# Altium PCB PCB_supply unit.PcbDoc
Units mm, origin at the board's own origin, x right, y up, seen from the top; angles counter-clockwise.
Board outline 65.5 x 61 mm, 4 copper layers (Top Layer, INT1, INT2, Bottom Layer), stack 1.49 mm thick; 38 components, 30 nets, 162 pads, 67 vias.
Unrouted connection lines stored in the file: 155.
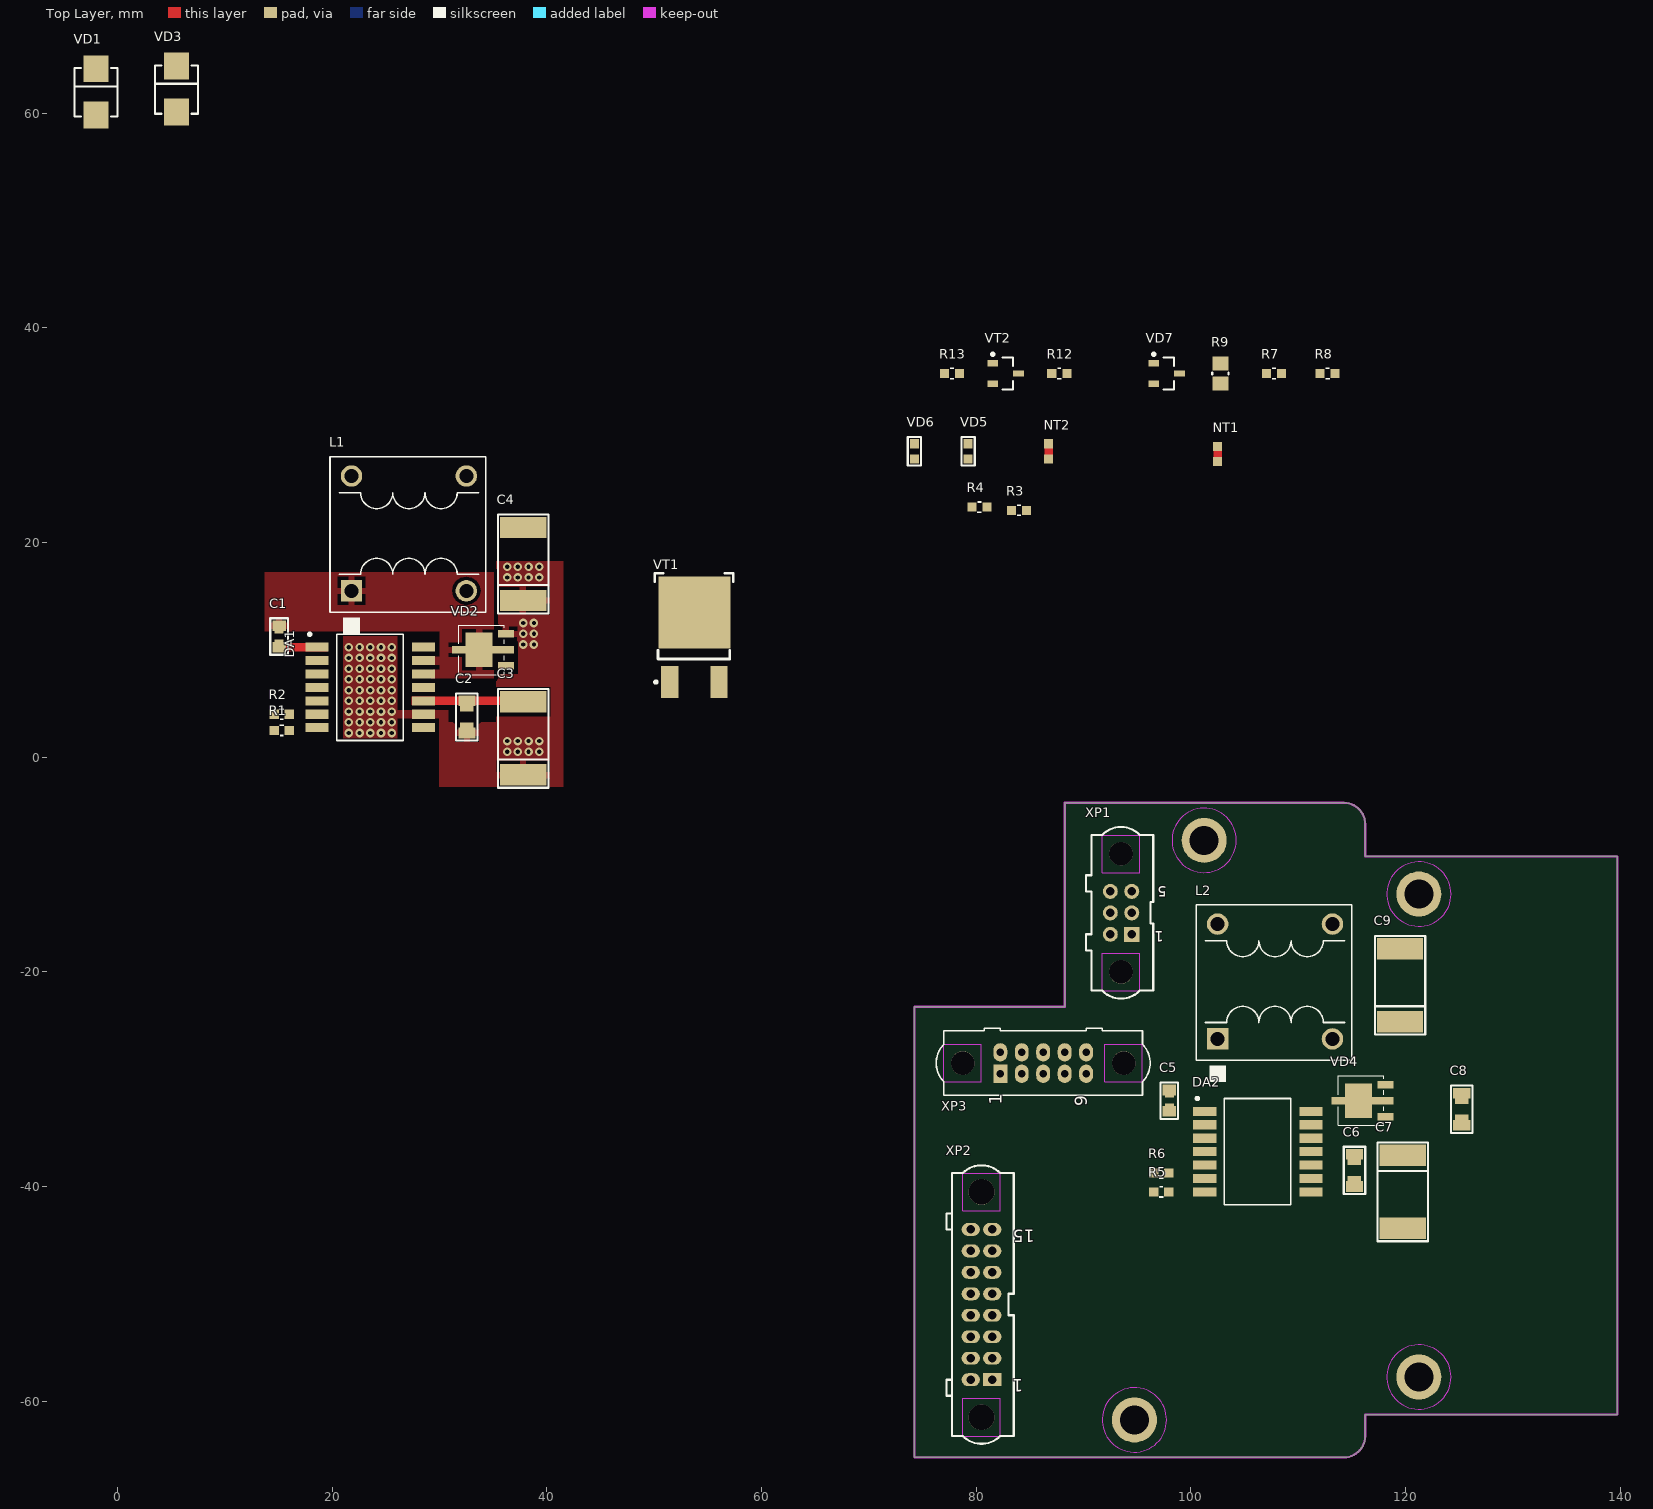
[diagram p0: Top Layer view]
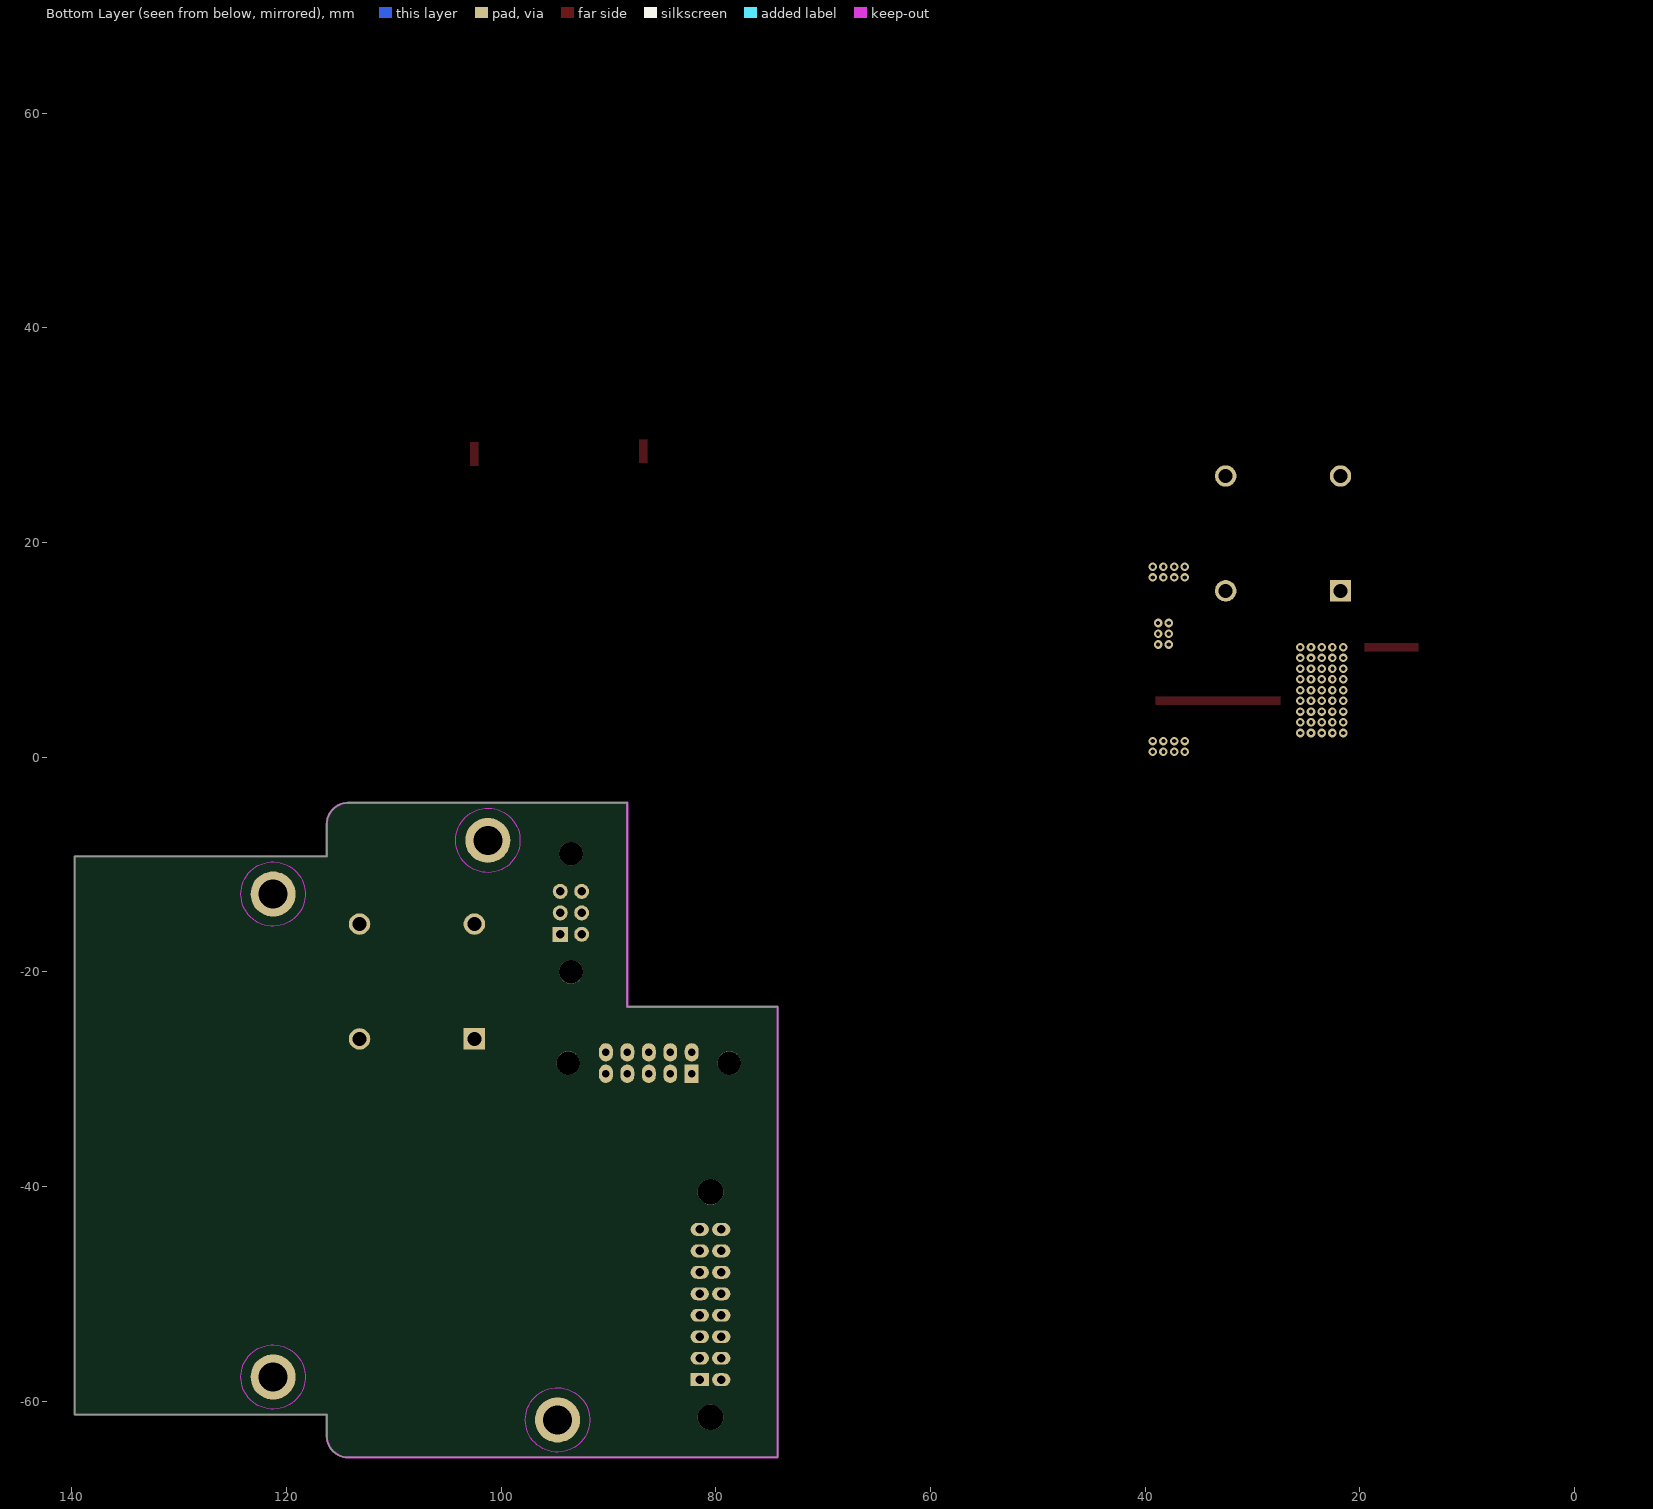
[diagram p1: Bottom Layer view, seen from below]
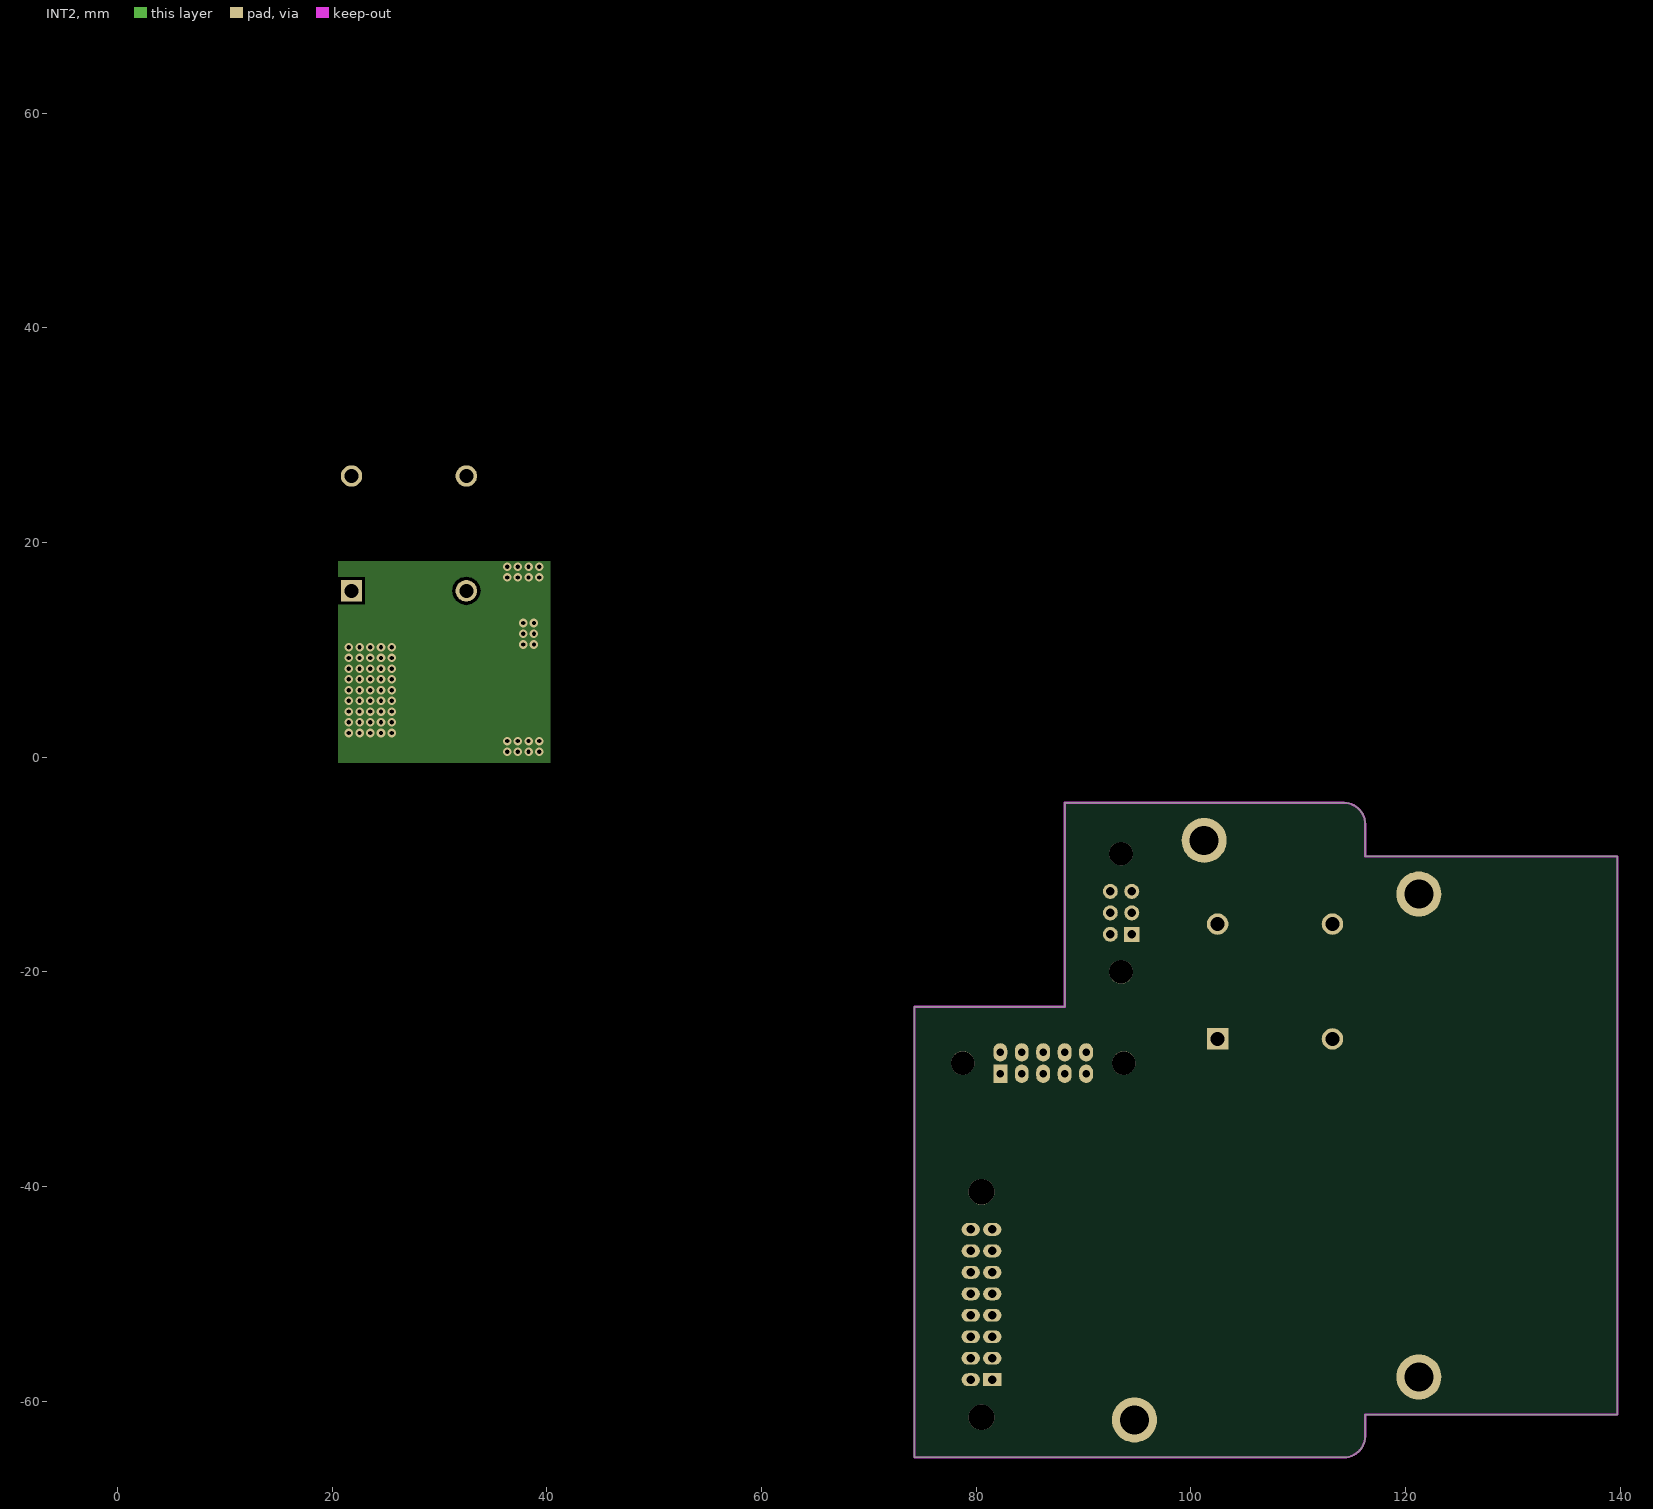
[diagram p2: INT2]

## Layer stack, top to bottom
Top Solder: solder mask 0.0102, Solder Resist, Dk 3.5
Top Layer: signal copper 0.035
PREPREG1: prepreg 0.32, 2116+7628, Dk 4.2
INT1: signal copper 0.035
CORE1: core 0.71, FR-4, Dk 4.2
INT2: signal copper 0.035
PREPREG2: prepreg 0.32, 2116+7628, Dk 4.2
Bottom Layer: signal copper 0.035
Bottom Solder: solder mask 0.0102, Solder Resist, Dk 3.5

## Board outline
74.25,-65.25 74.25,-23.25 88.25,-23.25 88.25,-4.25 114.25,-4.25 cw(c114.25,-6.25) 116.25,-6.25 116.25,-9.25 139.75,-9.25 139.75,-61.25 116.25,-61.25 116.25,-63.25 cw(c114.25,-63.25) 114.25,-65.25

## Design rules (kind name [scope] priority, off if disabled: settings)
Clearance Clearance_MultiLayerPad [OnLayer('Multi-Layer') and IsPad] p1: gap=0.3 ignorepadtopadclearanceinfootprint=FALSE except(0: Arc-Hole Track-Hole SMDPad-Hole THPad-Hole Via-Hole Fill-Hole Poly-Hole Region-Hole Text-Hole)
Clearance Clearance_Polygon [InPolygon] p2: gap=0.4 ignorepadtopadclearanceinfootprint=FALSE except(0: Arc-Hole Track-Hole SMDPad-Hole THPad-Hole Via-Hole Fill-Hole Poly-Hole Region-Hole Text-Hole)
Clearance [All] p3: gap=0.3 ignorepadtopadclearanceinfootprint=FALSE except(0: Arc-Hole Track-Hole SMDPad-Hole THPad-Hole Via-Hole Fill-Hole Poly-Hole Region-Hole Text-Hole)
ComponentClearance [All] p1 off: gap=0.254 collisioncheckmode=3 verticalgap=0.254 showdistances=FALSE
DiffPairsRouting [All] p1: maxlimit=0.254 minlimit=0.15 mostfreqgap=0.254 toplayer_minwidth=0.15 toplayer_maxwidth=0.381 toplayer_prefwidth=0.381 midlayer1_minwidth=0.15 midlayer1_maxwidth=0.381 midlayer1_prefwidth=0.381 midlayer2_minwidth=0.15 midlayer2_maxwidth=0.381 midlayer2_prefwidth=0.381 bottomlayer_minwidth=0.15 bottomlayer_maxwidth=0.381 bottomlayer_prefwidth=0.381 maxuncoupledlength=12.7
Height [All] p1: minheight=0 maxheight=60 prefheight=12.7
HoleSize [All] p1: absolutevalues=TRUE maxlimit=5 minlimit=0.3 maxpercent=80.000 minpercent=20.000
HoleToHoleClearance [All] p1: gap=0.2 allowstackedmicrovias=TRUE
MinimumAnnularRing MinimumAnnularRing_1 [All] p1: minimumring=0.2
MinimumSolderMaskSliver [All] p1: minsoldermaskwidth=0.15
PlaneClearance [All] p1: clearance=0.5
PlaneConnect [All] p1: planeconnectstyle=Relief reliefexpansion=0.5 reliefentries=4 reliefconductorwidth=0.3 reliefairgap=0.2
PolygonConnect PolygonConnect_PowerPAD [All vs InComponentClass('PowerPad')] p1: connectstyle=Direct reliefconductorwidth=1 reliefentries=4 polygonreliefangle="90 Angle" airgapwidth=0.3 // direct connection
PolygonConnect PolygonConnect_PadGND [InNet('GND') and IsPad] p2: connectstyle=Relief reliefconductorwidth=0.4 reliefentries=4 polygonreliefangle="90 Angle" airgapwidth=0.2
PolygonConnect PolygonConnect_Pad_thrue [InNet('GND2') and IsPad] p3: connectstyle=Relief reliefconductorwidth=0.4 reliefentries=4 polygonreliefangle="90 Angle" airgapwidth=0.2
PolygonConnect PolygonConnect_Via [IsVia] p4: connectstyle=Direct reliefconductorwidth=0.254 reliefentries=4 polygonreliefangle="90 Angle" airgapwidth=0.254
PolygonConnect [All] p5: connectstyle=Relief reliefconductorwidth=0.6 reliefentries=4 polygonreliefangle="90 Angle" airgapwidth=0.3
RoomDefinition supply_unit [InComponentClass('supply_unit')] p1 off: confinementstyle=ConfineIn formatcopy=TRUE lockcomponents=FALSE outline 69,10.75 117.75,10.75 117.75,45.75 69,45.75
RoutingVias [All] p1: holewidth=0.3 width=0.7 viastyle="Through Hole" minholewidth=0.3 minwidth=0.7 maxholewidth=0.5 maxwidth=1.2
SilkToSilkClearance [All] p1: silktosilkclearance=0
SilkToSolderMaskClearance [IsPad] p1: minsilkscreentomaskgap=0.05 clearancetoexposedcopper=TRUE
SolderMaskExpansion [All] p1: expansion=0.1
Width [All] p1: maxlimit=10 minlimit=0.3 preferedwidth=0.6
20 further rules are at their usual default settings.

## Classes and differential pairs
component class PowerPad: DA1 DA2

## Components (designator, comment, footprint, x,y, rotation, side; value= is the part's Value field where it differs from the comment)
C1 "Ceramic capacitor, 0.01мк, Н20, ±10%, 50V, 0603," "CAP: 0603+0805" 15.05,11.25 r270 top value=0.01мк
C2 "Ceramic capacitor, 0.1мк, Н20, ±10%, 50V, 0805," "CAP: 0805+1206" 32.55,3.75 r90 top value=0.1мк
C3 "Tantalum capacitor, 10мк, 25V, ±10%, 0.7 Ом, case E, -60...+125°C" "CAP: TANTAL-E" 37.8,1.75 r90 top value=10мк
C4 "Tantalum capacitor, 68мк, 25V, ±10%, 0.7 Ом, case E, -60...+125°C" "CAP: TANTAL-E" 37.8,18 r90 top value=68мк
C5 "Ceramic capacitor, 0.01мк, Н20, ±10%, 50V, 0603," "CAP: 0603+0805" 98,-32 r270 top value=0.01мк
C6 "Ceramic capacitor, 0.1мк, Н20, ±10%, 50V, 0805," "CAP: 0805+1206" 115.25,-38.5 r270 top value=0.1мк
C7 "Tantalum capacitor, 10мк, 25V, ±10%, 0.7 Ом, case E, -60...+125°C" "CAP: TANTAL-E" 119.75,-40.5 r270 top value=10мк
C8 "Ceramic capacitor, 0.1мк, Н20, ±10%, 50V, 0805," "CAP: 0805+1206" 125.25,-32.8 r270 top value=0.1мк
C9 "Tantalum capacitor, 100мк, 20V, ±10%, 0.5-0.7 Ом, case E, -60...+125°C" "CAP: TANTAL-E" 119.5,-21.25 r90 top value=100мк
DA1 "DC/DC buck converter, input 8...40V, 260 кHz, output 1.21...37V, 1A, -60...+115°C, 401.14-5М" 401.14-5М 23.55,6.5 r0 top
DA2 "DC/DC buck converter, input 8...40V, 260 кHz, output 1.21...37V, 1A, -60...+115°C, 401.14-5М" 401.14-5М 106.25,-36.75 r0 top
L1 "ДФПК7,5-2/x" "IND: DFPK7_5" 21.8,15.5 r0 top value="260 мк"
L2 "ДФПК7,5-2/x" "IND: DFPK7_5" 102.5,-26.25 r0 top value="260 мк"
NT1 "ValueManufacturerPartNumber" NetTie_0603 102.5,28.25 r90 top net-tie
NT2 "ValueManufacturerPartNumber" NetTie_0603 86.75,28.5 r90 top net-tie
R1 "Resistor film, 3.16k, ±1%, 0603, 0.1W, -55...+125°C" "RES: 0603P" 15.3,2.5 r180 top value=3.16k
R2 "Resistor film, 1k, ±1%, 0603, 0.1W, -55...+125°C" "RES: 0603P" 15.3,4 r180 top value=1k
R3 "Resistor film, 0.15, ±20%, 0603, 0.1W, -55...+125°C" "RES: 0603P" 84,23 r0 top value=0.15
R4 "Resistor film, 10k, ±5%, 0603, 0.1W, -55...+125°C" "RES: 0603P" 80.3,23.3 r0 top value=10k
R5 "Resistor film, 11.3k, ±1%, 0603, 0.1W, -55...+125°C" "RES: 0603P" 97.25,-40.5 r0 top value=11.3k
R6 "Resistor film, 1k, ±1%, 0603, 0.1W, -55...+125°C" "RES: 0603P" 97.25,-38.75 r0 top value=1k
R7 "Resistor film, 3.16k, ±1%, 0603, 0.1W, -55...+125°C" "RES: 0603P" 107.75,35.75 r0 top value=3.16k
R8 "Resistor film, 680, ±5%, 0603, 0.1W, -55...+125°C" "RES: 0603P" 112.75,35.75 r0 top value=680
R9 "Resistor film, 680, ±5%, 0805, 0.125W," "RES: 0805P" 102.75,35.75 r90 top value=680
R12 "Resistor film, 3.16k, ±1%, 0603, 0.1W, -55...+125°C" "RES: 0603P" 87.75,35.75 r0 top value=3.16k
R13 "Resistor film, 10k, ±5%, 0603, 0.1W, -55...+125°C" "RES: 0603P" 77.75,35.75 r0 top value=10k
VD1 "Zener diode, 39V, 8A, 0.9V, RecoveryTime, SMB(КД-42)," "DIODE: SMB" -2,62 r90 top
VD2 "ВЗПП Сборка Воронеж" КТ-99-1 36.05,10 r90 top
VD3 "Zener diode, 39V, 8A, 0.9V, RecoveryTime, SMB(КД-42)," "DIODE: SMB" 5.5,62.25 r90 top
VD4 "ВЗПП Сборка Воронеж" КТ-99-1 118,-32 r90 top
VD5 "LED, 20mA max, 2.1V typ, 1608, -55...+150°C" "LED: 0603G" 79.25,28.5 r90 top
VD6 "LED, 20mA max, 2.1V typ, 1608, -55...+150°C" "LED: 0603G" 74.25,28.5 r90 top
VD7 "TVS diode, 18V, 1A, VoltageDrop, RecoveryTime, SOT-23, -55...+150°C" SOT23 97.75,35.75 r0 top
VT1 "MOSFET P-channel transistor, 60V, 22A, 2.9nC, 2.5W, 40mOhm, 220pF, KT-89 (DPAK/TO-252), -55...+150°C" DPAK 53.75,10.25 r90 top
VT2 "NPN transistor, 30V, 100mA, , 300mW, 0.7V, 500, SOT-23 (КТ-46), -55...+125°C" SOT23 82.75,35.75 r0 top
XP1 "Вилка, 6pin, 2mm, 120VAC, 1.5A" "CON: M80-5000605" 93.5,-14.5 r180 top
XP2 ", 16pin, 2mm, 120VAC, 1.5A" "CON: M80-5001605" 80.5,-51 r180 top
XP3 "Вилка, 10pin, 2mm, 100V, 1.5A" "CON: HR M80-500S10" 86.25,-28.5 r90 top

## Footprints (in the part's own frame and the unit in brackets; to place one, negate y for a bottom-side part, rotate by r counter-clockwise, add the part's x,y. Pads: shape width x height; smd on the part's side, far side on the other; paste and mask are expansions set on the pad)
401.14-5М [mm] "USSR"
  rect 2.15x0.85 smd: 1(-4.95,3.75) 2(-4.95,2.5) 3(-4.95,1.25) 4(-4.95,0) 5(-4.95,-1.25) 6(-4.95,-2.5) 7(-4.95,-3.75) 8(4.95,-3.75) 9(4.95,-2.5) 10(4.95,-1.25) 11(4.95,0) 12(4.95,1.25) 13(4.95,2.5) 14(4.95,3.75)
  silkscreen extent -5.77,-4.95 3.08,5.08, body extent -4.99,-4.98 4.97,5.02, height 1.97
"CAP: 0603+0805" [mm] "совмещенный"
  rect 1x1.25 smd: 1(-1,0) 2(1,0)
  rect 0.85x0.85 smd: 1(-0.7,0) 2(0.7,0)
  silkscreen extent -1.7,-0.82 1.7,0.82, body extent -0.8,-0.4 0.8,0.4, height 0.3
"CAP: 0805+1206" [mm] "совмещенный"
  rect 1x1.6 smd: 1(-1.5,0) 2(1.5,0)
  rect 1x1.25 smd: 1(-1,0) 2(1,0)
  silkscreen extent -2.2,-1 2.2,1, body extent -1,-0.62 1,0.63, height 0.78
"CAP: TANTAL-E" [mm]
  rect 2x4.3 smd: 1(-3.4,0) 2(3.4,0)
  silkscreen extent -4.6,-2.35 4.6,2.35, body extent -3.7,-2.22 3.7,2.23, height 4.2
"CON: HR M80-500S10" [mm] "10 pin"
  round 2.2 hole 2.2 unplated: 0(0,7.5) 0(0,-7.5)
  rect 1.7x1.3 hole 0.7: 1(-1,4)
  oval 1.7x1.3 hole 0.7: 2(1,4) 3(-1,2) 4(1,2) 5(-1,0) 6(1,0) 7(-1,-2) 8(1,-2) 9(-1,-4) 10(1,-4)
  Top Layer keep-out lines w0.1: -1.75,9.25 1.75,9.25 1.75,5.75 -1.75,5.75 -1.75,9.25 ; -1.75,-5.75 -1.75,-9.25 1.75,-9.25 1.75,-5.75 -1.75,-5.75
  Bottom Layer pour cut-out: 2.2,-7.5 1.982,-6.545 1.372,-5.78 0.49,-5.355 -0.49,-5.355 -1.372,-5.78 -1.982,-6.545 -2.2,-7.5 -2.2,-7.5 -1.982,-8.455 -1.372,-9.22 -0.49,-9.645 0.49,-9.645 1.372,-9.22 1.982,-8.455 2.2,-7.5
  Bottom Layer pour cut-out: 2.2,7.5 1.982,8.455 1.372,9.22 0.49,9.645 -0.49,9.645 -1.372,9.22 -1.982,8.455 -2.2,7.5 -2.2,7.5 -1.982,6.545 -1.372,5.78 -0.49,5.355 0.49,5.355 1.372,5.78 1.982,6.545 2.2,7.5
  silkscreen extent -3,-9.97 3.25,9.97, body extent -2.78,-10 3.27,10, height 5.6
"CON: M80-5000605" [mm] "HR500"
  round 2.2 hole 2.2 unplated mask+0.1: 0(0,5.5) 0(0,-5.5)
  rect 1.4x1.4 hole 0.8: 1(-1,2)
  round 1.4 hole 0.8: 2(1,2) 3(-1,0) 4(1,0) 5(-1,-2) 6(1,-2)
  Top Layer keep-out lines w0.1: 1.75,7.25 1.75,3.75 -1.75,3.75 -1.75,7.25 1.75,7.25 ; 1.75,-3.75 1.75,-7.25 -1.75,-7.25 -1.75,-3.75 1.75,-3.75
  Bottom Layer pour cut-out: 2.2,-5.5 1.982,-4.545 1.372,-3.78 0.49,-3.355 -0.49,-3.355 -1.372,-3.78 -1.982,-4.545 -2.2,-5.5 -2.2,-5.5 -1.982,-6.455 -1.372,-7.22 -0.49,-7.645 0.49,-7.645 1.372,-7.22 1.982,-6.455 2.2,-5.5
  Bottom Layer pour cut-out: 2.2,5.5 1.982,6.455 1.372,7.22 0.49,7.645 -0.49,7.645 -1.372,7.22 -1.982,6.455 -2.2,5.5 -2.2,5.5 -1.982,4.545 -1.372,3.78 -0.49,3.355 0.49,3.355 1.372,3.78 1.982,4.545 2.2,5.5
  silkscreen extent -3,-8 3.25,8, body extent -2.78,-8 3.27,8, height 5.6
"CON: M80-5001605" [mm] "16pin Harwin"
  round 2.4 hole 2.4 unplated mask+0.1: 0(0,10.5) 0(0,-10.5)
  rect 1.7x1.2 hole 0.8: 1(-1,7)
  oval 1.7x1.2 hole 0.8: 2(1,7) 3(-1,5) 4(1,5) 5(-1,3) 6(1,3) 7(-1,1) 8(1,1) 9(-1,-1) 10(1,-1) 11(-1,-3) 12(1,-3) 13(-1,-5) 14(1,-5) 15(-1,-7) 16(1,-7)
  Top Layer keep-out lines w0.1: 1.75,12.25 -1.75,12.25 -1.75,8.75 1.75,8.75 1.75,12.25 ; 1.75,-8.75 -1.75,-8.75 -1.75,-12.25 1.75,-12.25 1.75,-8.75
  Bottom Layer pour cut-out: 2.2,-10.5 1.982,-9.545 1.372,-8.78 0.49,-8.355 -0.49,-8.355 -1.372,-8.78 -1.982,-9.545 -2.2,-10.5 -2.2,-10.5 -1.982,-11.455 -1.372,-12.22 -0.49,-12.645 0.49,-12.645 1.372,-12.22 1.982,-11.455 2.2,-10.5
  Bottom Layer pour cut-out: 2.2,10.5 1.982,11.455 1.372,12.22 0.49,12.645 -0.49,12.645 -1.372,12.22 -1.982,11.455 -2.2,10.5 -2.2,10.5 -1.982,9.545 -1.372,8.78 -0.49,8.355 0.49,8.355 1.372,8.78 1.982,9.545 2.2,10.5
  silkscreen extent -3,-12.97 3.25,12.97, body extent -2.77,-13 3.28,13, height 5.6
"DIODE: SMB" [mm]
  rect 2.5x2.3 smd: 1(-2.15,0) 2(2.15,0)
  silkscreen extent -2.3,-2 2.2,2, body extent -2.75,-1.95 2.75,1.95, height 2.45
DPAK [mm]
  rect 3x1.6 smd: 1(-3.25,2.29) 2(-3.25,-2.29)
  rect 6.7x6.7 smd: 3(3.25,0)
  round 0.5 on Mech1: ""(-3.2,2.9)
  silkscreen extent -3.37,-3.62 6.9,3.71, body extent -3.8,-3.32 6.3,3.42, height 2.37
"IND: DFPK7_5" [mm] "Александер Электрик"
  rect 2x2 hole 1.3: 1(0,0)
  round 2 hole 1.3: 2(10.7,0) 3(0,10.7) 4(10.7,10.7)
  silkscreen extent -2,-4 12.5,12.5, body extent -2,-2 12.5,12.5, height 7.5
"LED: 0603G" [mm]
  rect 0.85x0.85 smd: 1(-0.7,0) 2(0.7,0)
  silkscreen extent -1.33,-0.63 1.33,0.63, body extent -0.8,-0.4 0.8,0.4, height 0.6
NetTie_0603 [mm]
  rect 0.85x0.85 smd: 1(-0.7,0) 2(0.7,0)
  Top Layer region: -1.1,-0.4 1.1,-0.4 1.1,0.4 -1.1,0.4
"RES: 0603P" [mm] "small footprint"
  rect 0.85x0.85 smd: 1(-0.7,0) 2(0.7,0)
  silkscreen extent -0.2,-0.55 0.2,0.55, body extent -0.8,-0.4 0.8,0.4, height 0.44
"RES: 0805P" [mm] "small footprint"
  rect 1.3x1.5 smd: 1(-0.95,0) 2(0.95,0)
  Top Layer pour cut-out: -0.25,-0.75 -0.25,0.75 0.25,0.75 0.25,-0.75
  silkscreen extent -0.08,-0.75 0.08,0.75, body extent -1,-0.62 1,0.63, height 0.6
SOT23 [mm]
  rect 1x0.6 smd: 1(-1.2,0.95) 2(-1.2,-0.95) 3(1.2,0)
  round 0.5 on Mech1: ""(-0.9,1.1)
  silkscreen extent -1.32,-1.5 0.7,1.92, body extent -1.32,-1.52 1.32,1.52, height 1.12
КТ-99-1 [mm] "USSR"
  rect 0.7x1.5 smd: 1(-1.5,-0.15) A(1.5,-0.15)
  rect 0.7x2 smd: C(0,3.9) C(0,0.1)
  rect 3.2x2.55 smd: C(0,2.375)
  silkscreen extent -2.3,0 2.3,4.25, body extent -2.3,-0.68 2.3,4.57, height 1.61

## Part data
C1 C5: library part Ceramic_0603, Manufacturer=Монолит, Package=0603, PartNumber="К10-84в-1608М-50В-0,01 мкФ ±10%-Н20-N-A", Tolerance=±10%, TypeCapacitor="Ceramic capacitor", TypeDielectric=Н20, Voltage=50V, Analog="MAX 00123301 (K10-17в - 0805)", HelpURL=http://www.monolit.vitebsk.by/Files/K10-84.pdf, ValueManufacturerPartNumber="Ceramic capacitor, 0.01мк, Н20, ±10%, 50V, 0603,"
C2 C6 C8: library part Ceramic_1210, Manufacturer=Монолит, Package=0805, PartNumber="К10-84в-2012М-50В-0,1 мкФ +80/-20%-Н90-N-A", Tolerance=±10%, TypeCapacitor="Ceramic capacitor", TypeDielectric=Н20, Voltage=50V, Analog="MAX 00123747 (К10-17в - с1206)", HelpURL=http://www.monolit.vitebsk.by/Files/K10-84.pdf, ValueManufacturerPartNumber="Ceramic capacitor, 0.1мк, Н20, ±10%, 50V, 0805,"
C3 C7: library part Tantal_E, Manufacturer=Элеконд, Package="case E", PartNumber="К53-68 \"E\"-50 В-10мкф ±10%", Temperature=-60...+125°C, Tolerance=±10%, TypeCapacitor="Tantalum capacitor", Voltage=25V, Analog="00132739 (pin-to-pin на 15мкФ)", HelpURL=https://eandc.ru/pdf/kondensator/k53-68.pdf, Impedance="0.7 Ом", MAX=00145440, Polarity=+, ValueManufacturerPartNumber="Tantalum capacitor, 10мк, 25V, ±10%, 0.7 Ом, case E, -60...+125°C"
C4: library part Tantal_E, Manufacturer=Элеконд, Package="case E", PartNumber="К53-68 \"E\"-25 В-68мкф ±10%", Temperature=-60...+125°C, Tolerance=±10%, TypeCapacitor="Tantalum capacitor", Voltage=25V, HelpURL=https://eandc.ru/pdf/kondensator/k53-68.pdf, Impedance="0.7 Ом", MAX=00145468, Polarity=+, ValueManufacturerPartNumber="Tantalum capacitor, 68мк, 25V, ±10%, 0.7 Ом, case E, -60...+125°C"
C9: library part Tantal_E, Manufacturer=Элеконд, Package="case E", PartNumber="К53-68 \"E\"-20 В-100 мкф ±10%", Temperature=-60...+125°C, Tolerance=±10%, TypeCapacitor="Tantalum capacitor", Voltage=20V, HelpURL=https://eandc.ru/pdf/kondensator/k53-68.pdf, Impedance="0.5-0.7 Ом", MAX=00129948, Polarity=+, ValueManufacturerPartNumber="Tantalum capacitor, 100мк, 20V, ±10%, 0.5-0.7 Ом, case E, -60...+125°C"
DA1 DA2: library part 1273ПН1T1, "USSR Buck converter", CurrentOutput=1A, Frequency="260 кHz", Manufacturer=НИИЭТ, Package=401.14-5М, Temperature=-60...+115°C, VoltageInput="input 8...40V", VoltageOutput="output 1.21...37V", Analog=LM2675-ADJ, ComponentType="DC/DC buck converter", HelpURL=https://niiet.ru/product/id33, PartNumber=1273ПН1T1, ValueManufacturerPartNumber="DC/DC buck converter, input 8...40V, 260 кHz, output 1.21...37V, 1A, -60...+115°C, 401.14-5М"
L1 L2: "Дроссель фильтрации", Manufacturer="АЛЕКСАНДЕР ЭЛЕКТРИК", PartNumber=ДФПК7,5-2/0.8, HelpURL=http://www.aeip.ru/production/drosseli-filtratsii/seriya-df-dfk-dfp-dfpk/, Published=19.02.2015, TU="БКЮС.670109.002-01 ТУ", Type="Дроссель фильтрации"
NT1 NT2: library part NetTie
R1 R7 R12: library part Resistor_0603, Manufacturer="ОАО Ресурс", Package=0603, PartNumber="Р1-12-0,1ум.-3.16~кОм ±1%-М ШКАБ.434110.002 ТУ", Power=0.1W, Temperature=-55...+125°C, Tolerance=±1%, TypeResistor="Resistor film", HelpURL=https://aoresurs.com/catalog/chip_rezistory/rezistory-r1-12-kategoriya-kachestva-vp-/, MAX=00134464, ValueManufacturerPartNumber="Resistor film, 3.16k, ±1%, 0603, 0.1W, -55...+125°C"
R2 R6: library part Resistor_0603, Manufacturer="ОАО Ресурс", Package=0603, PartNumber="Р1-12-0,1ум.-1~кОм ±1%-М ШКАБ.434110.002 ТУ", Power=0.1W, Temperature=-55...+125°C, Tolerance=±1%, TypeResistor="Resistor film", HelpURL=https://aoresurs.com/catalog/chip_rezistory/rezistory-r1-12-kategoriya-kachestva-vp-/, MAX=00133971, ValueManufacturerPartNumber="Resistor film, 1k, ±1%, 0603, 0.1W, -55...+125°C"
R3: library part Resistor_0603, Manufacturer="ОАО Ресурс", Package=0603, PartNumber="Р1-12-0,1ум.-0.15~Ом ±20%-М ШКАБ.434110.002 ТУ", Power=0.1W, Temperature=-55...+125°C, Tolerance=±20%, TypeResistor="Resistor film", Analog="MAX 00117169 pin-to-pin", HelpURL=https://aoresurs.com/catalog/chip_rezistory/rezistory-r1-12-kategoriya-kachestva-vp-/, MAX=00133968, ValueManufacturerPartNumber="Resistor film, 0.15, ±20%, 0603, 0.1W, -55...+125°C"
R4 R13: library part Resistor_0603, Manufacturer="ОАО Ресурс", Package=0603, PartNumber="Р1-12-0,1ум.-10~кОм ±5%-М ШКАБ.434110.002 ТУ", Power=0.1W, Temperature=-55...+125°C, Tolerance=±5%, TypeResistor="Resistor film", Analog="MAX 00133986 (1%)", HelpURL=https://aoresurs.com/catalog/chip_rezistory/rezistory-r1-12-kategoriya-kachestva-vp-/, ValueManufacturerPartNumber="Resistor film, 10k, ±5%, 0603, 0.1W, -55...+125°C"
R5: library part Resistor_0603, Manufacturer="ОАО Ресурс", Package=0603, PartNumber="Р1-12-0,1ум.-11.3~кОм ±1%-М ШКАБ.434110.002 ТУ", Power=0.1W, Temperature=-55...+125°C, Tolerance=±1%, TypeResistor="Resistor film", Analog="00133993 (pin-to-pin 11k 5%)", HelpURL=https://aoresurs.com/catalog/chip_rezistory/rezistory-r1-12-kategoriya-kachestva-vp-/, ValueManufacturerPartNumber="Resistor film, 11.3k, ±1%, 0603, 0.1W, -55...+125°C"
R8: library part Resistor_0603, Manufacturer="ОАО Ресурс", Package=0603, PartNumber="Р1-12-0,1ум.-680~Ом ±5%-М ШКАБ.434110.002 ТУ", Power=0.1W, Temperature=-55...+125°C, Tolerance=±5%, TypeResistor="Resistor film", HelpURL=https://aoresurs.com/catalog/chip_rezistory/rezistory-r1-12-kategoriya-kachestva-vp-/, MAX=00134086, ValueManufacturerPartNumber="Resistor film, 680, ±5%, 0603, 0.1W, -55...+125°C"
R9: library part Resistor_0805, Manufacturer=Ресурс, Package=0805, PartNumber="Р1-12-0,125-680 Ом ±5%-М ШКАБ.434110.002 ТУ", Power=0.125W, Tolerance=±5%, TypeResistor="Resistor film", HelpURL=https://aoresurs.com/catalog/chip_rezistory/rezistory-r1-12-kategoriya-kachestva-vp-/, MAX=00133924, ValueManufacturerPartNumber="Resistor film, 680, ±5%, 0805, 0.125W,"
VD1 VD3: library part TVS_single, Current=8A, Manufacturer=НЗПП, Package=SMB(КД-42), PartNumber=2Р245Е91, Voltage=39V, VoltageDrop=0.9V, Analog=SMA6J33A, HelpURL=http://www.nzpp.ru/product/, TypeDiode="Zener diode", ValueManufacturerPartNumber="Zener diode, 39V, 8A, 0.9V, RecoveryTime, SMB(КД-42),"
VD2 VD4: library part Schottky_single, Current=1А, Package=КТ-99-1, PartNumber=2ДШ2123Д95, Voltage=100V, VoltageDrop=0.78, Analog="MAX 00143791 (pin-to-pin).Впритык(40В)", Manufacturer="ВЗПП Сборка Воронеж", TypeDiode="Schottky diode", ValueManufacturerPartNumber="ВЗПП Сборка Воронеж"
VD5 VD6: library part LED_single, Color=GREEN, Current="20mA max", Manufacturer=Протон, Package=1608, PartNumber=ИПД169А9-Л, Temperature=-55...+150°C, VoltageDrop="2.1V typ", Analog="MAX 00129484 КР-1608 Kingbright (pin-to-pin)", TypeDiode=LED, ValueManufacturerPartNumber="LED, 20mA max, 2.1V typ, 1608, -55...+150°C"
  VD5: CommentText=15V
  VD6: CommentText=5V
VD7: library part TVS_array_var2, Current=1A, Manufacturer=КРИП, Package=SOT-23, PartNumber=2Р192В9, Temperature=-55...+150°C, Voltage=18V, Analog="КР192А9 (ОТК) (pin-to-pin)", Cap=21pF, NOTE="указано для pin1-pin3", TypeDiode="TVS diode", Uогр.=22.5V, ValueManufacturerPartNumber="TVS diode, 18V, 1A, VoltageDrop, RecoveryTime, SOT-23, -55...+150°C"
VT1: library part MOSFET_P_132, CurrentDS=22A, InputCapacitor=220pF, Manufacturer=Ангстрем, MaxPower=2.5W, Package="KT-89 (DPAK/TO-252)", PartNumber=2ПЕ209Б92, Temperature=-55...+150°C, VoltageDS=60V, Analog="SUD50P06-15 (pin-to-pin)", GateCharge=2.9nC, HelpURL=https://www.vishay.com/docs/68940/sud50p06-15.pdf, RDS=40mOhm, TypeTransistor="MOSFET P-channel transistor", ValueManufacturerPartNumber="MOSFET P-channel transistor, 60V, 22A, 2.9nC, 2.5W, 40mOhm, 220pF, KT-89 (DPAK/TO-252), -55...+150°C"
VT2: library part BJT_NPN_132, CurrentCE=100mA, CurrentGain=500, Manufacturer="ООО НПК Далекс", MaxPower=300mW, Package="SOT-23 (КТ-46)", PartNumber=2Т3130Б9, Temperature=-55...+125°C, VoltageCE=30V, VoltageSaturation=0.7V, HelpURL=http://www.radioman-portal.ru/sprav/pp/transisters/sourse/2t3130.pdf, MAX=00123842, TypeTransistor="NPN transistor", ValueManufacturerPartNumber="NPN transistor, 30V, 100mA, , 300mW, 0.7V, 500, SOT-23 (КТ-46), -55...+125°C"
XP1: library part "M80-5000605 Harwin", "вилка на плату", CurrentMax=1.5A, Manufacturer=Электроделать, PartNumber=СНП401-6ВП21-3-1-1, VoltageMax=120VAC, Analog="MAX 00126397 (M80-5000605 pin-to-pin)", CommentText=СНП401, HelpURL=https://eu.mouser.com/ProductDetail/Harwin/M80-5000605?qs=yQtJ9TWM%2F1KaJIUUBEXorg%3D%3D, Multichannel=6pin, Pitch=2mm, TypeConnector=Вилка, ValueManufacturerPartNumber="Вилка, 6pin, 2mm, 120VAC, 1.5A"
XP2: library part "M80-5001205 Harwin_1", "вилка на плату", CurrentMax=1.5A, Manufacturer=Электродеталь, PartNumber=СНП401-16ВП21-3-1-1, VoltageMax=120VAC, Analog="MAX 00139241 [М80-5101605] (pin-to-pin)", CommentText=СНП401, HelpURL=https://www.digikey.com/product-detail/en/harwin-inc/M80-5001605/952-2626-ND/5175716, Multichannel=16pin, Pitch=2mm, ValueManufacturerPartNumber=", 16pin, 2mm, 120VAC, 1.5A"
XP3: library part "M80-5001005 Harwin", "вилка на плату", CurrentMax=1.5A, Manufacturer=Электродеталь, PartNumber=СНП401-10ВП21-3-1-1, VoltageMax=100V, Analog="MAX 00126377 (M80-5001042 pin-to-pin)", CommentText=СНП401, HelpURL=https://eu.mouser.com/ProductDetail/Harwin/M80-5001005?qs=yQtJ9TWM%2F1KRz59nPe3lqQ%3D%3D, Multichannel=10pin, Pitch=2mm, TypeConnector=Вилка, ValueManufacturerPartNumber="Вилка, 10pin, 2mm, 100V, 1.5A"

## Free pads (board coordinates)
  round 4.2 hole 2.7: ""(94.75,-61.75) ""(101.25,-7.75) ""(121.25,-57.75) ""(121.25,-12.75)

## Via types
v1: diameter 0.8, hole 0.4, Top Layer to Bottom Layer, tented both sides, 67 vias

## Nets (pads, with @x,y where several pads share a name; then routed paths per layer and width w, separated by ;. In a path a pad name is that pad's centre, name@x,y a point inside that pad or via, vN(x,y) a via of type N, cw(c..) or ccw(c..) an arc to the next point about the centre after c; other vN are vias at no path point)
+5V: C8.2 C9.2 L2.3 R5.2 VD6.1 XP3.1
+15V: C4.2 L1.3 R1.2 VD5.1 XP1.5
+27V_AM: C6.2 C7.2 DA2.10 DA2.11 VD3.2 XP2.5
+27V_RM: C2.2 C3.2 DA1.10 DA1.11 R9.1 VD1.2 VD7.1 VD7.2 VT1.2 XP2.1 XP2.3
"+27V_RM (lim)": R9.2 VT1.3 XP1.1 XP1.3
A_P: XP2.12 XP3.8
ADR0: XP2.7 XP3.4
ADR1: XP2.8 XP3.5
B_N: XP2.13 XP3.9
DC_MOSFET: R3.1 R12.1 XP3.3
GND(AM): C6.1 C7.1 C8.1 C9.1 DA2.9 NT1.1 NT2.1 R6.2 R8.2 R13.1 VD3.1 VD4.A VT2.2 XP2.6 XP2.9 XP3.2
GND(RM): C2.1 C3.1 C4.1 DA1.9 NT1.2 R2.2 R4.1 R7.1 VD1.1 VD2.A XP1.2 XP1.4 XP1.6 XP2.2 XP2.4
  other v1: 36.3,0.5 37.3,0.5 38.3,0.5 39.3,0.5 36.3,1.5 37.3,1.5 38.3,1.5 39.3,1.5 21.55,2.25 22.55,2.25 23.55,2.25 24.55,2.25 25.55,2.25 21.55,3.25 22.55,3.25 23.55,3.25 24.55,3.25 25.55,3.25 21.55,4.25 22.55,4.25 23.55,4.25 24.55,4.25 25.55,4.25 21.55,5.25 22.55,5.25 23.55,5.25 24.55,5.25 25.55,5.25 21.55,6.25 22.55,6.25 23.55,6.25 24.55,6.25 25.55,6.25 21.55,7.25 22.55,7.25 23.55,7.25 24.55,7.25 25.55,7.25 21.55,8.25 22.55,8.25 23.55,8.25 24.55,8.25 25.55,8.25 21.55,9.25 22.55,9.25 23.55,9.25 24.55,9.25 25.55,9.25 21.55,10.25 22.55,10.25 23.55,10.25 24.55,10.25 25.55,10.25 37.8,10.5 38.8,10.5 37.8,11.5 38.8,11.5 37.8,12.5 38.8,12.5 36.3,16.75 37.3,16.75 38.3,16.75 39.3,16.75 36.3,17.75 37.3,17.75 38.3,17.75 39.3,17.75
NetC1_1: C1.1 DA1.12 DA1.13 L1.1 VD2.C
NetC1_2: C1.2 DA1.1
NetC5_1: C5.1 DA2.12 DA2.13 L2.1 VD4.C
NetC5_2: C5.2 DA2.1
NetDA1_6: DA1.6 R1.1 R2.1
NetDA1_8: DA1.8 R3.2 R4.2
NetDA2_6: DA2.6 R5.1 R6.1
NetL1_2: L1.2 L1.4
NetL2_2: L2.2 L2.4
NetR7_2: R7.2 VD5.2
NetR8_1: R8.1 VD6.2
NetR10_2: VD7.3 VT1.1
NetR11_2: VT2.3
NetR12_2: R12.2 R13.2 VT2.1
R1.120: XP2.10 XP3.6
R2.120: XP2.11 XP3.7
RSGND: NT2.2 XP2.14 XP3.10
Корпус: XP2.15
pads on no net: DA1.2 DA1.3 DA1.4 DA1.5 DA1.7 DA1.14 DA2.2 DA2.3 DA2.4 DA2.5 DA2.7 DA2.8 DA2.14 VD2.1 VD4.1 VD7. VT1. VT2. XP1.0 XP2.0 XP2.16 XP3.0

## Polygon pours and split planes (outlines as drawn)
NetC1_1 on Top Layer "NETC1_1_L01_P000" (solid, remove dead copper, pour order 0): 30,8.625 29.2,8.625 29.2,9.375 30,9.375 30,11.75 13.7,11.75 13.7,17.25 35.05,17.25 35.05,7.375 29.2,7.375 29.2,8.125 30,8.125
GND(RM) on Top Layer "GND" (solid, remove dead copper, pour order 4): 35.3,18.25 35.3,15.25 35.3,3.25 30.8,3.25 30.8,4.375 27.3,4.375 27.3,3.625 29.975,3.625 29.975,-2.75 41.55,-2.75 41.55,18.25
GND(RM) on Top Layer "GND(RM)_L01_P008" (solid, remove dead copper, pour order 8): 26.05,3.625 28.5,3.625 28.5,4.375 26.05,4.375 26.05,11.25 21.05,11.25 21.05,1.75 26.05,1.75
GND(RM) on INT2 "GND(RM)_L03_P006" (solid, remove dead copper, pour order 6): 21.05,1.75 26.05,1.75 26.05,11.25 21.05,11.25
GND(RM) on INT2 "GND(RM)_L03_P009" (solid, remove dead copper, pour order 9): 28.8,-0.5 30.05,-0.5 40.3,-0.5 40.3,18.25 20.55,18.25 20.55,2 20.55,-0.5

## Keep-outs
Top Layer:
  circle w0.05: c101.25,-7.75 r3
  circle w0.05: c121.25,-12.75 r3
  circle w0.05: c121.25,-57.75 r3
  circle w0.05: c94.75,-61.75 r3
Bottom Layer:
  circle w0.05: c101.25,-7.75 r3
  circle w0.05: c121.25,-12.75 r3
  circle w0.05: c121.25,-57.75 r3
  circle w0.05: c94.75,-61.75 r3
Keep-Out Layer:
  the board outline again, w0.2

## Other copper
Top Layer:
  region net NetC1_2: 19.55,9.85 19.55,10.65 14.55,10.65 14.55,9.85
  region net +27V_RM: 39.05,4.85 39.05,5.65 27.4,5.65 27.4,4.85

## Text inside footprints (layer, text, board x,y; h text height)
L1: Top Assy "4" at 32.218,25.049 h0.63; Top Assy "3" at 21.618,25.149 h0.63; Top Assy "2" at 32.318,16.649 h0.63; Top Assy "1" at 21.818,16.649 h0.63
L2: Top Assy "4" at 112.918,-16.701 h0.63; Top Assy "3" at 102.318,-16.601 h0.63; Top Assy "2" at 113.018,-25.101 h0.63; Top Assy "1" at 102.518,-25.101 h0.63
XP1: Top Overlay "5" at 97.775,-12.025 h1 r180; Top Overlay "1" at 97.5,-16.2 h1 r180
XP2: Top Overlay "1" at 84.4,-57.55 h2 r180; Top Overlay "15" at 85.45,-43.6 h2 r180
XP3: Top Overlay "9" at 90.75,-32.527 h2 r90; Top Overlay "1" at 82.8,-32.4 h2 r90